# Allegro board EGC_MCB_V100R001.brd
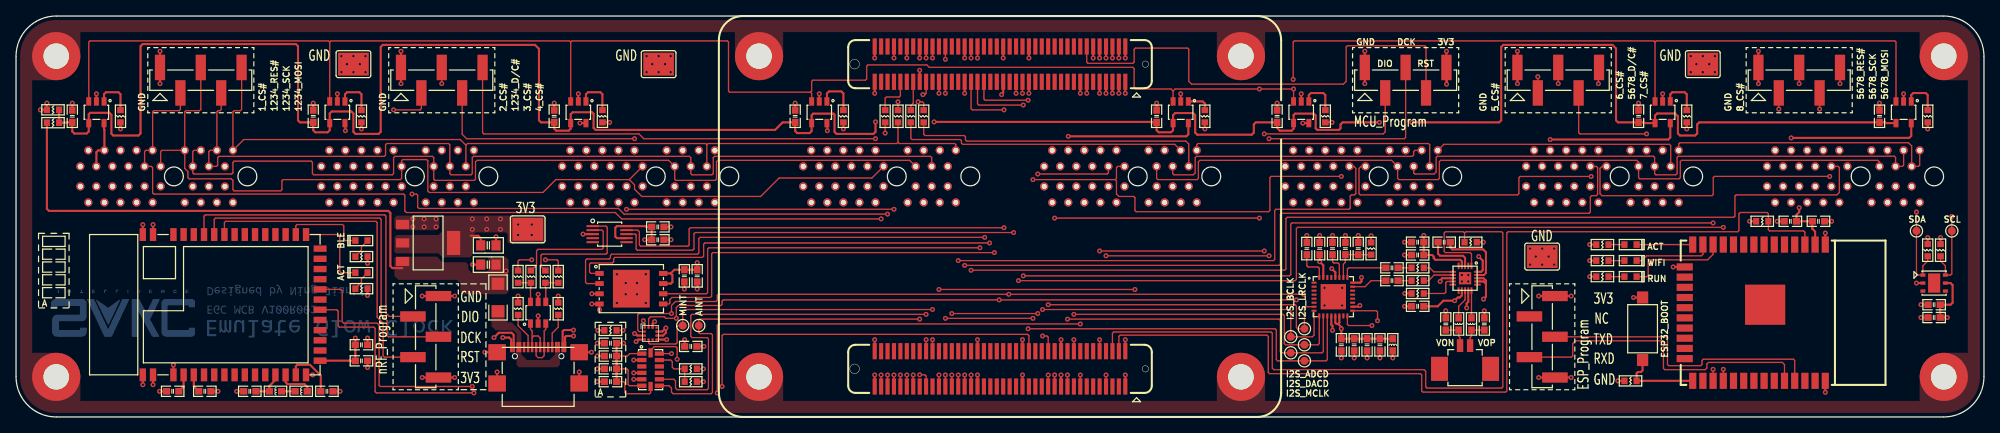
[diagram p0: board, top side]
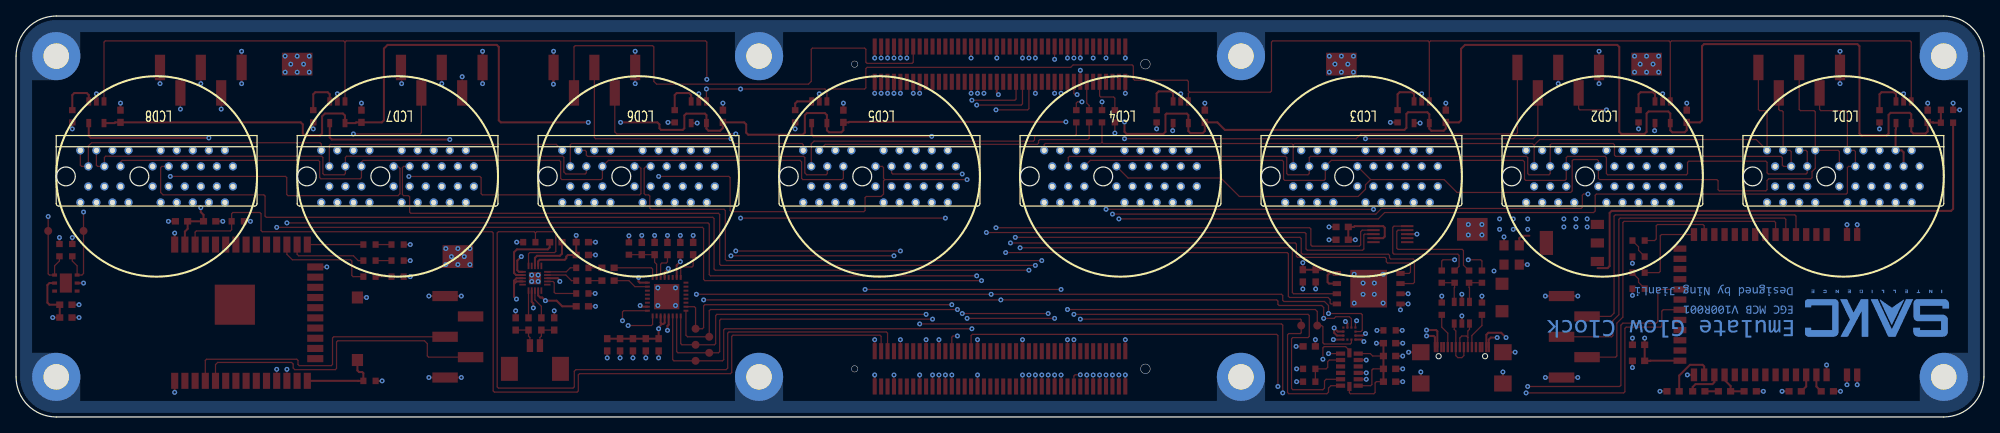
[diagram p1: board, bottom side, seen from below]

Outline 245 x 50 mm; copper layers: TOP, ART01, ART02, BOTTOM. Coordinates in mm from the lower left corner of the outline.
Outline path: 0,45 0,5 arc(1.46,1.46) 5,0 240,0 arc(243.54,1.46) 245,5 245,45 arc(243.54,48.54) 240,50 5,50 arc(1.46,48.54) 0,45

## Design rules (mm)
constraint set DEFAULT: min track width 0.152

## Placement (name value [footprint] x y rotation side)
C1  GRM188R71H104KA93#  [C0603]  7 37.5 90 top
C2  GRM188R71H104KA93#  [C0603]  67 37.5 90 top
C3  GRM188R71H104KA93#  [C0603]  142 37.5 90 top
C4  GRM188R71H104KA93#  [C0603]  202 37.5 90 top
C5  GRM188R71H104KA93#  [C0603]  37 37.5 90 top
C6  GRM188R71H104KA93#  [C0603]  97 37.5 90 top
C7  GRM188R71H104KA93#  [C0603]  157 37.5 90 top
C8  GRM188R71H104KA93#  [C0603]  232 37.5 90 top
C9  GRM21BR61E106MA73#  [C0805]  59.75 19 180 top
C10  GRM21BR61E106MA73#  [C0805]  57.85 21.4 0 top
C11  GRM188R71H104KA93#  [C0603]  79.9 22.1 0 top
C12  GRM188R61E105MA12#  [C0603]  79.9 23.7 0 top
C13  GRM188R71H104KA93#  [C0603]  238.8 14 180 top
C14  GRM188R61E475ME11#  [C0603]  238.8 12.4 180 top
C15  GRM188R71H104KA93#  [C0603]  84 8.8 0 top
C16  GRM188R71H104KA93#  [C0603]  74 9.2 180 top
C17  GRM188R61E105MA12#  [C0603]  74 6 180 top
C18  GRM188R61E475ME11#  [C0603]  74 7.6 180 top
C19  GRM188R71H104KA93#  [C0603]  74 4.4 180 top
C20  GRM188R71H104KA93#  [C0603]  165 9 270 top
C21  GRM188R71H104KA93#  [C0603]  162.3 21 90 top
C22  GRM188R61E475ME11#  [C0603]  166.6 9 270 top
C23  GRM188R71H104KA93#  [C0603]  168.2 9 270 top
C24  GRM188R71H104KA93#  [C0603]  165.5 21 90 top
C25  GRM188R61E475ME11#  [C0603]  169.8 9 270 top
C26  GRM188R61E475ME11#  [C0603]  167.1 21 90 top
C27  GRM188R61E475ME11#  [C0603]  160.7 21 90 top
C28  GRM188R61E475ME11#  [C0603]  163.9 21 90 top
C29  GRM188R61E475ME11#  [C0603]  174.5 21.8 180 top
C30  GRM188R71H104KA93#  [C0603]  174.5 20.2 180 top
C31  GRM188R71E153KA01#  [C0603]  171.3 18.6 0 top
C32  GRM188R71E153KA01#  [C0603]  171.3 17 0 top
C33  GRM188R61E475ME11#  [C0603]  177.8 21.8 0 top
C34  GRM188R61E475ME11#  [C0603]  174.5 13.8 180 top
C35  GRM188R71E102KA01#  [C0603]  178 11.6 90 top
C36  GRM188R71E102KA01#  [C0603]  182.8 11.6 90 top
C37  GRM188R71H104KA93#  [C0603]  83.2 17.6 270 top
C38  GRM188R61E475ME11#  [C0603]  84.8 17.6 270 top
C39  GRM188R71H104KA93#  [C0603]  38.7 3.2 0 top
C40  GRM1885C1H101JA01#  [C0603]  23.5 3.2 180 top
C41  GRM1885C1H101JA01#  [C0603]  19.5 3.2 0 top
C42  GRM188R61E475ME11#  [C0603]  43 9 0 top
C43  GRM188R61E105MA12#  [C0603]  29.1 3.2 180 top
C44  GRM188R71H104KA93#  [C0603]  43 7 0 top
C45  GRM188R71H104KA93#  [C0603]  224.4 24.4 180 top
C46  GRM188R61E105MA12#  [C0603]  220.9 24.4 0 top
F1  SL1206200  [R1206]  60 13.19 90 top
L1  BLM18AG102SN1  [L0603]  171.4 9 90 top
L2  BLM18AG102SN1  [L0603]  181.2 11.6 270 top
L3  BLM18AG102SN1  [L0603]  179.6 11.6 270 top
L4  MLZ1608N100LT000  [L0603]  35.5 3.2 180 top
L5  CLH1608T-15NJ-N  [L0603]  32.3 3.2 180 top
M1  HOLE_3R18MM_PLATED  [MHOLE125]  5 5 0 top
M2  HOLE_3R18MM_PLATED  [MHOLE125]  240 5 0 top
M3  HOLE_3R18MM_PLATED  [MHOLE125]  240 45 0 top
M4  HOLE_3R18MM_PLATED  [MHOLE125]  5 45 0 top
M5  HOLE_3R18MM_PLATED  [MHOLE125]  92.5 45 0 top
M6  HOLE_3R18MM_PLATED  [MHOLE125]  92.5 5 0 top
M7  HOLE_3R18MM_PLATED  [MHOLE125]  152.5 5 0 top
M8  HOLE_3R18MM_PLATED  [MHOLE125]  152.5 45 0 top
MD1  E73-2G4M04S1B  [MD_1130X689_44P]  37.85 5.25 90 top
MD2  ESP32-WROOM-32  [MD1004X709_38P_TP]  225.25 21.5 270 top
NOREF  -  []  73.26 10.42 90 top
NOREF#2  -  []  173.74 15.4 0 top
NOREF#3  -  []  78.5 21.46 90 top
NOREF#4  -  []  177.37 10.2 0 top
NOREF#5  -  []  205.95 36.65 90 top
NOREF#6  -  []  177.06 21.42 0 top
NOREF#7  -  []  164.62 9.74 0 top
NOREF#8  -  []  65.16 17.12 90 top
NOREF#9  -  []  41.6 6.37 90 top
NOREF#10  -  []  42.26 17.62 0 top
NOREF#11  -  []  147.26 37.12 90 top
NOREF#12  -  []  158.74 38.83 90 top
NOREF#13  -  []  41.86 17.59 90 top
NOREF#14  -  []  61.54 21.98 0 top
NOREF#15  -  []  71.86 37.09 90 top
NOREF#16  -  []  109.65 30 0 top
NOREF#17  -  []  4.98 37.89 0 top
NOREF#18  -  []  26 28.75 90 top
NOREF#19  -  []  74.32 5.59 0 top
NOREF#20  -  []  219.5 23.77 90 top
NOREF#21  -  []  37.94 3.2 0 top
NOREF#22  -  []  62.31 7.83 0 top
NOREF#23  -  []  83.26 5.62 0 top
NOREF#24  -  []  42.26 19.62 0 top
NOREF#25  -  []  142.38 36.76 90 top
NOREF#26  -  []  155.79 37.09 90 top
NOREF#27  -  []  173.69 20.58 0 top
NOREF#28  -  []  72.79 5.59 90 top
NOREF#29  -  []  66.76 17.12 0 top
NOREF#30  -  []  225.8 23.77 90 top
NOREF#31  -  []  205.64 36.13 0 top
NOREF#32  -  []  10.64 36.13 0 top
NOREF#33  -  []  16.65 38.83 90 top
NOREF#34  -  []  104.4 44 0 top
NOREF#35  -  []  188.09 18.58 0 top
NOREF#36  -  []  169.42 8.19 90 top
NOREF#37  -  []  110 36.87 0 top
NOREF#38  -  []  215.26 16.5 0 top
NOREF#39  -  []  29.42 2.79 0 top
NOREF#40  -  []  46.65 40.73 90 top
NOREF#41  -  []  199.6 3.87 90 top
NOREF#42  -  []  59.68 18.36 0 top
NOREF#43  -  []  201.38 21.09 0 top
NOREF#44  -  []  74.74 8.82 90 top
NOREF#45  -  []  71.75 -2.18 0 top
NOREF#46  -  []  57.77 20.77 0 top
NOREF#47  -  []  241.24 21.94 0 top
NOREF#48  -  []  41.6 17.36 0 top
NOREF#49  -  []  179.99 11.19 90 top
NOREF#50  -  []  40.64 36.13 0 top
NOREF#51  -  []  12.26 37.12 0 top
NOREF#52  -  []  196.1 16.86 0 top
NOREF#53  -  []  96.24 37.5 0 top
NOREF#54  -  []  101.6 39.95 0 top
NOREF#55  -  []  72.26 37.12 0 top
NOREF#56  -  []  231.37 36.1 0 top
NOREF#57  -  []  74.25 13.72 90 top
NOREF#58  -  []  206.52 38.89 90 top
NOREF#59  -  []  198 28.75 0 top
NOREF#60  -  []  78 9.4 90 top
NOREF#61  -  []  216 23.77 90 top
NOREF#62  -  []  28.29 3.58 0 top
NOREF#63  -  []  49.45 25.05 0 top
NOREF#64  -  []  111.6 36.87 90 top
NOREF#65  -  []  36.9 2.56 90 top
NOREF#66  -  []  62.11 7.58 0 top
NOREF#67  -  []  178.12 21.39 0 top
NOREF#68  -  []  61.74 17.5 0 top
NOREF#69  -  []  36.24 37.5 0 top
NOREF#70  -  []  215.65 40.73 90 top
NOREF#71  -  []  162.62 20.59 0 top
NOREF#72  -  []  166.47 19.6 0 top
NOREF#73  -  []  141 26.75 0 top
NOREF#74  -  []  17.5 30 0 top
NOREF#75  -  []  206 28.75 90 top
NOREF#76  -  []  236.86 37.09 90 top
NOREF#77  -  []  164.22 20.59 0 top
NOREF#78  -  []  243.25 21.06 90 top
NOREF#79  -  []  79.65 30 0 top
NOREF#80  -  []  17.05 5.25 0 top
NOREF#81  -  []  105.49 9 0 top
NOREF#82  -  []  200.24 21.5 0 top
NOREF#83  -  []  228 28.75 0 top
NOREF#84  -  []  19.65 30 0 top
NOREF#85  -  []  196.1 20.86 0 top
NOREF#86  -  []  74.38 10.39 0 top
NOREF#87  -  []  229.07 28.98 0 top
NOREF#88  -  []  207.24 37.5 0 top
NOREF#89  -  []  177.24 11.6 0 top
NOREF#90  -  []  161.01 8.54 0 top
NOREF#91  -  []  83.24 6 0 top
NOREF#92  -  []  82.56 19 0 top
NOREF#93  -  []  166.65 38.83 90 top
NOREF#94  -  []  33.7 2.56 90 top
NOREF#95  -  []  101.6 36.87 90 top
NOREF#96  -  []  169.65 30 0 top
NOREF#97  -  []  106.8 36.87 0 top
NOREF#98  -  []  70.95 36.65 90 top
NOREF#99  -  []  137.05 2.8 0 top
NOREF#100  -  []  46.65 38.83 90 top
NOREF#101  -  []  180.44 11.6 0 top
NOREF#102  -  []  108.58 37.09 0 top
NOREF#103  -  []  64.48 17.09 0 top
NOREF#104  -  []  237 26.75 90 top
NOREF#105  -  []  41.86 21.59 90 top
NOREF#106  -  []  146.86 37.09 90 top
NOREF#107  -  []  42.24 9 0 top
NOREF#108  -  []  222 43.59 0 top
NOREF#109  -  []  236.52 38.89 90 top
NOREF#110  -  []  79.16 21.72 90 top
NOREF#111  -  []  179.22 12.34 0 top
NOREF#112  -  []  173.69 22.18 0 top
NOREF#113  -  []  41.6 21.36 90 top
NOREF#114  -  []  176.4 21.16 90 top
NOREF#115  -  []  71.6 39.95 0 top
NOREF#116  -  []  166.22 9.74 0 top
NOREF#117  -  []  110.26 37.09 90 top
NOREF#118  -  []  110.66 37.12 0 top
NOREF#119  -  []  78.69 21.69 90 top
NOREF#120  -  []  177 26.75 90 top
NOREF#121  -  []  100 39.35 0 top
NOREF#122  -  []  82.6 3.77 0 top
NOREF#123  -  []  182.04 11.6 0 top
NOREF#124  -  []  106.65 45.2 90 top
NOREF#125  -  []  42.26 19.62 90 top
NOREF#126  -  []  23 43.59 0 top
NOREF#127  -  []  172 31.25 0 top
NOREF#128  -  []  202 31.25 0 top
NOREF#129  -  []  41.79 8.59 90 top
NOREF#130  -  []  164.28 20.26 90 top
NOREF#131  -  []  37.3 2.56 90 top
NOREF#132  -  []  162.43 13.43 0 top
NOREF#133  -  []  61.36 17.09 90 top
NOREF#134  -  []  175.9 13.16 90 top
NOREF#135  -  []  70.75 -4.88 0 top
NOREF#136  -  []  238.04 12.4 0 top
NOREF#137  -  []  37.96 2.82 90 top
NOREF#138  -  []  41.6 39.95 0 top
NOREF#139  -  []  236.6 36.87 0 top
NOREF#140  -  []  61.1 18.34 0 top
NOREF#141  -  []  221.22 23.99 0 top
NOREF#142  -  []  160 39.35 0 top
NOREF#143  -  []  146.52 38.89 0 top
NOREF#144  -  []  9.15 5.25 0 top
NOREF#145  -  []  199.6 3.87 0 top
NOREF#146  -  []  84.32 8.39 0 top
NOREF#147  -  []  148.38 37.09 0 top
NOREF#148  -  []  163.26 19.6 0 top
NOREF#149  -  []  160.06 19.6 0 top
NOREF#150  -  []  113.38 37.09 0 top
NOREF#151  -  []  167.44 9 0 top
NOREF#152  -  []  178.75 17.29 0 top
NOREF#153  -  []  215.65 40.73 0 top
NOREF#154  -  []  3.2 36.06 0 top
NOREF#155  -  []  40.5 4.45 0 top
NOREF#156  -  []  3.84 38.3 0 top
NOREF#157  -  []  42.26 6.62 90 top
NOREF#158  -  []  72.6 19 0 top
NOREF#159  -  []  109.06 37.12 0 top
NOREF#160  -  []  196.74 17.5 0 top
NOREF#161  -  []  229.65 30 0 top
NOREF#162  -  []  237.21 22.74 0 top
NOREF#163  -  []  61.1 16.86 0 top
NOREF#164  -  []  196.74 19.5 0 top
NOREF#165  -  []  196.76 17.12 0 top
NOREF#166  -  []  82.6 5.37 90 top
NOREF#167  -  []  158.19 8 0 top
NOREF#168  -  []  36.24 2.82 90 top
NOREF#169  -  []  37.85 9.56 90 top
NOREF#170  -  []  238.38 20.39 0 top
NOREF#171  -  []  77.33 8.17 0 top
NOREF#172  -  []  0 0 0 top
NOREF#173  -  []  41.79 6.59 90 top
NOREF#174  -  []  159.94 21 0 top
NOREF#175  -  []  40.09 42.32 90 top
NOREF#176  -  []  57.29 20.77 90 top
NOREF#177  -  []  197.88 19.09 0 top
NOREF#178  -  []  208.74 4.51 90 top
NOREF#179  -  []  49.07 28.98 0 top
NOREF#180  -  []  238.46 20.39 90 top
NOREF#181  -  []  140.81 44.34 0 top
NOREF#182  -  []  178.32 11.19 0 top
NOREF#183  -  []  82.79 8.39 90 top
NOREF#184  -  []  196.1 20.86 90 top
NOREF#185  -  []  168 28.75 0 top
NOREF#186  -  []  200.26 17.12 0 top
NOREF#187  -  []  196.1 18.86 0 top
NOREF#188  -  []  3.86 37.92 90 top
NOREF#189  -  []  43.32 6.59 0 top
NOREF#190  -  []  37.96 2.82 0 top
NOREF#191  -  []  200.26 21.12 90 top
NOREF#192  -  []  235.64 36.13 0 top
NOREF#193  -  []  201.74 6.39 0 top
NOREF#194  -  []  70.64 36.13 0 top
NOREF#195  -  []  95.79 37.09 90 top
NOREF#196  -  []  65.64 11.13 0 top
NOREF#197  -  []  49.73 3.65 90 top
NOREF#198  -  []  207.75 7.28 90 top
NOREF#199  -  []  64.5 16.86 90 top
NOREF#200  -  []  5 5 0 top
NOREF#201  -  []  200.65 8 0 top
NOREF#202  -  []  159.31 9.54 0 top
NOREF#203  -  []  61.8 21.98 0 top
NOREF#204  -  []  158.19 10 0 top
NOREF#205  -  []  146.6 36.87 90 top
NOREF#206  -  []  168.52 8.59 0 top
NOREF#207  -  []  178.39 11.19 90 top
NOREF#208  -  []  79.16 23.32 0 top
NOREF#209  -  []  103.38 37.09 0 top
NOREF#210  -  []  180.36 21.42 90 top
NOREF#211  -  []  160.64 36.13 0 top
NOREF#212  -  []  40 39.35 0 top
NOREF#213  -  []  196.44 42 0 top
NOREF#214  -  []  3.86 36.32 90 top
NOREF#215  -  []  63.74 13.83 90 top
NOREF#216  -  []  161.52 38.89 0 top
NOREF#217  -  []  141.62 36.76 0 top
NOREF#218  -  []  216.66 24.02 0 top
NOREF#219  -  []  142 31.25 0 top
NOREF#220  -  []  167.48 20.26 90 top
NOREF#221  -  []  101.6 36.87 0 top
NOREF#222  -  []  82.44 17.6 0 top
NOREF#223  -  []  96.62 36.76 0 top
NOREF#224  -  []  56 28.75 90 top
NOREF#225  -  []  58.89 3.08 90 top
NOREF#226  -  []  168.59 8.59 90 top
NOREF#227  -  []  79.27 3.23 90 top
NOREF#228  -  []  173.76 15.02 0 top
NOREF#229  -  []  173.1 16.36 0 top
NOREF#230  -  []  38.74 38.83 90 top
NOREF#231  -  []  223.19 23.99 90 top
NOREF#232  -  []  71.67 21.03 90 top
NOREF#233  -  []  74.74 5.62 90 top
NOREF#234  -  []  110.64 37.5 0 top
NOREF#235  -  []  240.5 17.5 90 top
NOREF#236  -  []  223.64 24.4 0 top
NOREF#237  -  []  199.86 4.09 90 top
NOREF#238  -  []  83.24 4.4 0 top
NOREF#239  -  []  61.1 16.86 90 top
NOREF#240  -  []  196.76 21.12 90 top
NOREF#241  -  []  43.38 15.59 0 top
NOREF#242  -  []  62.88 17.09 0 top
NOREF#243  -  []  49.45 18.35 90 top
NOREF#244  -  []  206.6 36.87 90 top
NOREF#245  -  []  180.82 12.34 0 top
NOREF#246  -  []  11.6 39.95 0 top
NOREF#247  -  []  48.78 10.95 90 top
NOREF#248  -  []  78.09 42.32 90 top
NOREF#249  -  []  61.76 17.12 90 top
NOREF#250  -  []  13.38 37.09 0 top
NOREF#251  -  []  161.6 36.87 90 top
NOREF#252  -  []  83.26 8.42 0 top
NOREF#253  -  []  178.86 16.9 90 top
NOREF#254  -  []  237.4 15.7 0 top
NOREF#255  -  []  237.59 11.99 90 top
NOREF#256  -  []  73.24 4.4 0 top
NOREF#257  -  []  62.7 16.86 0 top
NOREF#258  -  []  207.26 37.12 90 top
NOREF#259  -  []  139.07 28.98 0 top
NOREF#260  -  []  117 26.75 90 top
NOREF#261  -  []  152.5 5 0 top
NOREF#262  -  []  11.6 39.95 90 top
NOREF#263  -  []  173.76 16.62 90 top
NOREF#264  -  []  41.6 19.36 90 top
NOREF#265  -  []  69.47 1.32 0 top
NOREF#266  -  []  200.26 4.12 90 top
NOREF#267  -  []  85.61 10.94 0 top
NOREF#268  -  []  170.56 18.22 0 top
NOREF#269  -  []  4.98 36.29 0 top
NOREF#270  -  []  78.25 9.65 90 top
NOREF#271  -  []  173.74 20.2 0 top
NOREF#272  -  []  236 28.75 90 top
NOREF#273  -  []  173 43.59 0 top
NOREF#274  -  []  159.89 9 0 top
NOREF#275  -  []  49.73 16.35 0 top
NOREF#276  -  []  167.56 10.4 0 top
NOREF#277  -  []  64.25 8.71 0 top
NOREF#278  -  []  6.37 36.1 0 top
NOREF#279  -  []  83.61 10.94 0 top
NOREF#280  -  []  28.34 3.2 0 top
NOREF#281  -  []  22.74 3.2 0 top
NOREF#282  -  []  179.22 10.79 90 top
NOREF#283  -  []  220.26 11.5 90 top
NOREF#284  -  []  5 0 90 top
NOREF#285  -  []  101.52 38.89 0 top
NOREF#286  -  []  170.09 16.59 90 top
NOREF#287  -  []  41.86 37.09 90 top
NOREF#288  -  []  49.41 7.46 0 top
NOREF#289  -  []  35.79 37.09 90 top
NOREF#290  -  []  167.42 20.59 0 top
NOREF#291  -  []  232.32 37.09 0 top
NOREF#292  -  []  16.65 40.73 90 top
NOREF#293  -  []  181.59 11.19 90 top
NOREF#294  -  []  44.65 6.83 90 top
NOREF#295  -  []  80.1 7.1 90 top
NOREF#296  -  []  173.36 18.19 90 top
NOREF#297  -  []  158 28.75 0 top
NOREF#298  -  []  171.72 8.59 0 top
NOREF#299  -  []  185.65 40.73 90 top
NOREF#300  -  []  58.76 17.93 0 top
NOREF#301  -  []  156.24 37.5 0 top
NOREF#302  -  []  161.52 38.89 90 top
NOREF#303  -  []  199.86 19.09 90 top
NOREF#304  -  []  175.9 21.16 90 top
NOREF#305  -  []  82 31.25 0 top
NOREF#306  -  []  206.6 39.95 0 top
NOREF#307  -  []  84.42 16.79 90 top
NOREF#308  -  []  238.86 20.42 0 top
NOREF#309  -  []  33.56 5.25 0 top
NOREF#310  -  []  137.05 40.8 0 top
NOREF#311  -  []  36.1 5.25 0 top
NOREF#312  -  []  79.27 4.37 90 top
NOREF#313  -  []  164.74 21 0 top
NOREF#314  -  []  59.19 20.74 0 top
NOREF#315  -  []  161.5 12.5 0 top
NOREF#316  -  []  80.22 23.29 0 top
NOREF#317  -  []  66.36 17.09 90 top
NOREF#318  -  []  156.62 36.76 0 top
NOREF#319  -  []  22.29 2.79 90 top
NOREF#320  -  []  23.82 2.79 0 top
NOREF#321  -  []  188.09 18.58 90 top
NOREF#322  -  []  166.72 20.26 0 top
NOREF#323  -  []  182.42 10.86 0 top
NOREF#324  -  []  62.96 17.09 90 top
NOREF#325  -  []  39.02 2.79 0 top
NOREF#326  -  []  57 26.75 90 top
NOREF#327  -  []  170.12 8.59 0 top
NOREF#328  -  []  169.07 28.98 0 top
NOREF#329  -  []  8.74 38.83 90 top
NOREF#330  -  []  106.9 41.8 0 top
NOREF#331  -  []  43.38 19.59 0 top
NOREF#332  -  []  206.6 39.95 90 top
NOREF#333  -  []  236.6 20.16 90 top
NOREF#334  -  []  7.32 37.09 0 top
NOREF#335  -  []  111.86 37.09 90 top
NOREF#336  -  []  174.82 19.79 0 top
NOREF#337  -  []  83.26 4.02 90 top
NOREF#338  -  []  196.36 21.09 90 top
NOREF#339  -  []  5 0 90 top
NOREF#340  -  []  30.5 2.56 90 top
NOREF#341  -  []  16.65 40.73 0 top
NOREF#342  -  []  185.65 38.83 90 top
NOREF#343  -  []  169.16 10.4 0 top
NOREF#344  -  []  79.07 28.98 0 top
NOREF#345  -  []  63.4 11.05 90 top
NOREF#346  -  []  74.32 7.19 0 top
NOREF#347  -  []  141.24 37.5 0 top
NOREF#348  -  []  5.79 37.09 90 top
NOREF#349  -  []  79.14 23.7 0 top
NOREF#350  -  []  161.5 12.5 90 top
NOREF#351  -  []  42.26 15.62 0 top
NOREF#352  -  []  74.32 8.79 0 top
NOREF#353  -  []  80.67 4.97 90 top
NOREF#354  -  []  200.24 17.5 0 top
NOREF#355  -  []  179.78 8.9 0 top
NOREF#356  -  []  92.5 5 0 top
NOREF#357  -  []  40.09 42.58 90 top
NOREF#358  -  []  175.24 21.42 90 top
NOREF#359  -  []  87 26.75 90 top
NOREF#360  -  []  171.02 8.26 0 top
NOREF#361  -  []  59.8 18.36 90 top
NOREF#362  -  []  61.76 13.12 90 top
NOREF#363  -  []  179.7 21.16 0 top
NOREF#364  -  []  174.88 16.59 0 top
NOREF#365  -  []  159.89 7 0 top
NOREF#366  -  []  71.6 39.95 90 top
NOREF#367  -  []  63.36 17.12 0 top
NOREF#368  -  []  208.74 4.51 90 top
NOREF#369  -  []  169.9 16.36 90 top
NOREF#370  -  []  78.09 42.58 0 top
NOREF#371  -  []  138.1 41.8 90 top
NOREF#372  -  []  169.82 38.83 90 top
NOREF#373  -  []  72.64 17.91 0 top
NOREF#374  -  []  101.86 37.09 90 top
NOREF#375  -  []  27.45 42 0 top
NOREF#376  -  []  170.56 16.62 90 top
NOREF#377  -  []  77.5 3.4 0 top
NOREF#378  -  []  171.62 18.19 0 top
NOREF#379  -  []  161.92 20.26 0 top
NOREF#380  -  []  64.5 16.86 0 top
NOREF#381  -  []  178.9 15.8 90 top
NOREF#382  -  []  177.62 10.86 0 top
NOREF#383  -  []  188.41 7.46 0 top
NOREF#384  -  []  165.32 8.59 0 top
NOREF#385  -  []  18.74 3.2 0 top
NOREF#386  -  []  200.24 4.5 0 top
NOREF#387  -  []  239.98 20.39 0 top
NOREF#388  -  []  240.49 23.2 0 top
NOREF#389  -  []  217.78 23.99 0 top
NOREF#390  -  []  174.88 14.99 0 top
NOREF#391  -  []  174.82 13.39 0 top
NOREF#392  -  []  37.38 36.76 90 top
NOREF#393  -  []  167.96 20.62 90 top
NOREF#394  -  []  139.65 30 0 top
NOREF#395  -  []  171.62 16.59 0 top
NOREF#396  -  []  236.6 39.95 0 top
NOREF#397  -  []  42.24 18 0 top
NOREF#398  -  []  111.6 36.87 0 top
NOREF#399  -  []  161.6 36.87 0 top
NOREF#400  -  []  178.27 8.4 90 top
NOREF#401  -  []  165.84 9 0 top
NOREF#402  -  []  140.81 6.34 0 top
NOREF#403  -  []  218.82 38.83 90 top
NOREF#404  -  []  104.86 44.39 0 top
NOREF#405  -  []  55.45 10 0 top
NOREF#406  -  []  75.4 3.77 90 top
NOREF#407  -  []  182.16 10.2 0 top
NOREF#408  -  []  80.22 21.69 0 top
NOREF#409  -  []  0 45 0 top
NOREF#410  -  []  173.74 13.8 0 top
NOREF#411  -  []  219.69 23.99 90 top
NOREF#412  -  []  236.6 20.16 0 top
NOREF#413  -  []  183.18 10.86 90 top
NOREF#414  -  []  241.61 22.74 0 top
NOREF#415  -  []  201.38 19.09 0 top
NOREF#416  -  []  106.8 36.87 90 top
NOREF#417  -  []  166.92 8.59 0 top
NOREF#418  -  []  6.62 36.76 0 top
NOREF#419  -  []  37.49 2.79 90 top
NOREF#420  -  []  74.77 19.93 0 top
NOREF#421  -  []  161.02 20.59 0 top
NOREF#422  -  []  18.76 2.82 90 top
NOREF#423  -  []  174.88 18.19 0 top
NOREF#424  -  []  107.06 37.09 90 top
NOREF#425  -  []  42.26 15.62 90 top
NOREF#426  -  []  110 36.87 90 top
NOREF#427  -  []  176.59 21.39 90 top
NOREF#428  -  []  173.1 14.77 90 top
NOREF#429  -  []  165.57 13.43 90 top
NOREF#430  -  []  173.1 16.36 90 top
NOREF#431  -  []  173.76 16.62 0 top
NOREF#432  -  []  41.86 15.59 90 top
NOREF#433  -  []  199.86 21.09 90 top
NOREF#434  -  []  12.24 37.5 0 top
NOREF#435  -  []  208.09 42.32 90 top
NOREF#436  -  []  74.74 7.22 90 top
NOREF#437  -  []  51 26.75 0 top
NOREF#438  -  []  18.76 2.82 0 top
NOREF#439  -  []  196.76 21.12 0 top
NOREF#440  -  []  181.48 21.39 0 top
NOREF#441  -  []  39.84 42.58 0 top
NOREF#442  -  []  53.03 17.69 0 top
NOREF#443  -  []  58.81 11.97 90 top
NOREF#444  -  []  49.65 30 0 top
NOREF#445  -  []  73.24 6 0 top
NOREF#446  -  []  61.1 12.87 90 top
NOREF#447  -  []  3.2 37.66 90 top
NOREF#448  -  []  73.24 9.2 0 top
NOREF#449  -  []  62.88 13.09 0 top
NOREF#450  -  []  226.44 42 0 top
NOREF#451  -  []  178.97 13 0 top
NOREF#452  -  []  146 28.75 90 top
NOREF#453  -  []  42.24 7 0 top
NOREF#454  -  []  236.6 39.95 90 top
NOREF#455  -  []  164.37 10.4 0 top
NOREF#456  -  []  179.64 16.54 0 top
NOREF#457  -  []  108.66 37.09 90 top
NOREF#458  -  []  165.82 20.59 0 top
NOREF#459  -  []  218 28.75 0 top
NOREF#460  -  []  70.11 4.17 90 top
NOREF#461  -  []  201.38 4.09 0 top
NOREF#462  -  []  201 26.75 0 top
NOREF#463  -  []  82.82 18.34 0 top
NOREF#464  -  []  36.37 36.1 0 top
NOREF#465  -  []  42.26 37.12 90 top
NOREF#466  -  []  67.38 36.76 90 top
NOREF#467  -  []  31.49 3.58 0 top
NOREF#468  -  []  53 43.59 0 top
NOREF#469  -  []  38 28.75 0 top
NOREF#470  -  []  11.6 36.87 0 top
NOREF#471  -  []  72.26 37.12 90 top
NOREF#472  -  []  67.32 37.09 0 top
NOREF#473  -  []  48.12 21.7 90 top
NOREF#474  -  []  225.14 24.02 90 top
NOREF#475  -  []  106.65 7.2 90 top
NOREF#476  -  []  170.64 9 0 top
NOREF#477  -  []  100.64 36.13 0 top
NOREF#478  -  []  82.86 3.99 90 top
NOREF#479  -  []  235.95 36.65 90 top
NOREF#480  -  []  220.16 24.02 90 top
NOREF#481  -  []  71.6 36.87 0 top
NOREF#482  -  []  237.59 13.59 90 top
NOREF#483  -  []  102.26 37.12 0 top
NOREF#484  -  []  61.1 12.87 0 top
NOREF#485  -  []  107.46 37.12 90 top
NOREF#486  -  []  0 5 0 top
NOREF#487  -  []  238.05 15.51 90 top
NOREF#488  -  []  162.26 37.12 0 top
NOREF#489  -  []  161.6 39.95 90 top
NOREF#490  -  []  79.16 21.72 0 top
NOREF#491  -  []  157.38 36.76 90 top
NOREF#492  -  []  11.52 38.89 0 top
NOREF#493  -  []  237.26 37.12 90 top
NOREF#494  -  []  237.3 15.2 0 top
NOREF#495  -  []  238.86 20.42 90 top
NOREF#496  -  []  200.26 4.12 0 top
NOREF#497  -  []  165.88 20.26 90 top
NOREF#498  -  []  166.99 8.59 90 top
NOREF#499  -  []  48 28.75 0 top
NOREF#500  -  []  206.6 36.87 0 top
NOREF#501  -  []  58.83 11.94 0 top
NOREF#502  -  []  64.76 17.09 90 top
NOREF#503  -  []  162.69 20.59 90 top
NOREF#504  -  []  34.69 3.58 0 top
NOREF#505  -  []  145.95 36.65 90 top
NOREF#506  -  []  169.42 9.74 0 top
NOREF#507  -  []  237.1 15.5 0 top
NOREF#508  -  []  173.36 16.59 90 top
NOREF#509  -  []  84.42 18.34 0 top
NOREF#510  -  []  242.89 0.92 0 top
NOREF#511  -  []  19.82 38.83 90 top
NOREF#512  -  []  231.62 36.76 0 top
NOREF#513  -  []  180.34 21.8 0 top
NOREF#514  -  []  226.45 22 0 top
NOREF#515  -  []  169.08 20.59 0 top
NOREF#516  -  []  220.14 24.4 0 top
NOREF#517  -  []  66.1 16.86 90 top
NOREF#518  -  []  3.84 36.7 0 top
NOREF#519  -  []  47.85 17.61 90 top
NOREF#520  -  []  101.52 38.89 90 top
NOREF#521  -  []  145 39.35 0 top
NOREF#522  -  []  109.07 28.98 0 top
NOREF#523  -  []  22 31.25 0 top
NOREF#524  -  []  165.88 17.1 90 top
NOREF#525  -  []  66.74 17.5 0 top
NOREF#526  -  []  86 28.75 90 top
NOREF#527  -  []  98.74 38.83 90 top
NOREF#528  -  []  181.52 11.19 0 top
NOREF#529  -  []  216 23.77 0 top
NOREF#530  -  []  147 26.75 90 top
NOREF#531  -  []  160.95 36.65 90 top
NOREF#532  -  []  143.74 38.83 90 top
NOREF#533  -  []  83.26 4.02 0 top
NOREF#534  -  []  164.87 19.6 0 top
NOREF#535  -  []  147.26 37.12 0 top
NOREF#536  -  []  240.2 15.7 90 top
NOREF#537  -  []  102.24 37.5 0 top
NOREF#538  -  []  97.32 37.09 0 top
NOREF#539  -  []  170.19 8.59 90 top
NOREF#540  -  []  79.65 30 0 top
NOREF#541  -  []  208.09 42.58 90 top
NOREF#542  -  []  64.39 8.56 90 top
NOREF#543  -  []  56.83 20.36 90 top
NOREF#544  -  []  66.1 12.87 90 top
NOREF#545  -  []  239.12 11.99 0 top
NOREF#546  -  []  164.29 20.59 90 top
NOREF#547  -  []  196.36 17.09 90 top
NOREF#548  -  []  161.54 21 0 top
NOREF#549  -  []  78.47 8.17 0 top
NOREF#550  -  []  156.37 36.1 0 top
NOREF#551  -  []  146.52 38.89 90 top
NOREF#552  -  []  200.79 37.09 90 top
NOREF#553  -  []  166.22 8.19 90 top
NOREF#554  -  []  41.86 19.59 90 top
NOREF#555  -  []  239.54 12.02 90 top
NOREF#556  -  []  10.95 36.65 90 top
NOREF#557  -  []  200.26 19.12 0 top
NOREF#558  -  []  27 26.75 90 top
NOREF#559  -  []  43.32 8.59 0 top
NOREF#560  -  []  42.24 37.5 0 top
NOREF#561  -  []  108 28.75 0 top
NOREF#562  -  []  229.65 30 0 top
NOREF#563  -  []  223.59 24.78 0 top
NOREF#564  -  []  199.6 18.86 0 top
NOREF#565  -  []  162.24 37.5 0 top
NOREF#566  -  []  8 28.75 0 top
NOREF#567  -  []  233.74 38.83 90 top
NOREF#568  -  []  109.06 37.12 90 top
NOREF#569  -  []  61.8 21.72 90 top
NOREF#570  -  []  201.62 36.76 0 top
NOREF#571  -  []  82.86 5.59 90 top
NOREF#572  -  []  83.26 5.62 90 top
NOREF#573  -  []  3.2 36.06 90 top
NOREF#574  -  []  103.6 42.08 0 top
NOREF#575  -  []  224.72 23.99 0 top
NOREF#576  -  []  196.76 19.12 90 top
NOREF#577  -  []  188.73 16.35 0 top
NOREF#578  -  []  78.69 23.29 90 top
NOREF#579  -  []  236.09 23.2 0 top
NOREF#580  -  []  108.4 36.87 90 top
NOREF#581  -  []  169.9 17.96 90 top
NOREF#582  -  []  240.2 11.77 90 top
NOREF#583  -  []  232.75 4 90 top
NOREF#584  -  []  200.26 17.12 90 top
NOREF#585  -  []  40.95 36.65 90 top
NOREF#586  -  []  103.6 4.08 0 top
NOREF#587  -  []  40.09 42.58 0 top
NOREF#588  -  []  15.78 5.25 0 top
NOREF#589  -  []  66.36 36.1 0 top
NOREF#590  -  []  138.1 3.8 90 top
NOREF#591  -  []  3.86 36.32 0 top
NOREF#592  -  []  78.11 9.51 90 top
NOREF#593  -  []  61.76 17.12 0 top
NOREF#594  -  []  78 28.75 0 top
NOREF#595  -  []  100.95 36.65 90 top
NOREF#596  -  []  42.26 6.62 0 top
NOREF#597  -  []  76.93 11.51 0 top
NOREF#598  -  []  140.79 37.09 90 top
NOREF#599  -  []  171 26.75 0 top
NOREF#600  -  []  179.6 7.88 0 top
NOREF#601  -  []  66.28 17.09 0 top
NOREF#602  -  []  66.76 13.12 0 top
NOREF#603  -  []  66.1 12.87 0 top
NOREF#604  -  []  7.38 36.76 90 top
NOREF#605  -  []  178.27 12.9 0 top
NOREF#606  -  []  41.52 38.89 0 top
NOREF#607  -  []  37.46 6.22 90 top
NOREF#608  -  []  167.96 20.62 0 top
NOREF#609  -  []  175.24 19.82 90 top
NOREF#610  -  []  112.26 37.12 0 top
NOREF#611  -  []  183.65 6.83 90 top
NOREF#612  -  []  197.88 21.09 0 top
NOREF#613  -  []  201.37 36.1 0 top
NOREF#614  -  []  72.24 37.5 0 top
NOREF#615  -  []  72.4 21.3 0 top
NOREF#616  -  []  63.36 17.12 90 top
NOREF#617  -  []  216.64 24.4 0 top
NOREF#618  -  []  77.5 3.4 90 top
NOREF#619  -  []  196.74 21.5 0 top
NOREF#620  -  []  173.74 21.8 0 top
NOREF#621  -  []  111 26.75 0 top
NOREF#622  -  []  60.2 12.45 0 top
NOREF#623  -  []  72.6 13 90 top
NOREF#624  -  []  34.29 2.79 90 top
NOREF#625  -  []  61.76 13.12 0 top
NOREF#626  -  []  66.74 13.5 0 top
NOREF#627  -  []  47.87 17.59 0 top
NOREF#628  -  []  173.76 18.22 0 top
NOREF#629  -  []  41.6 36.87 90 top
NOREF#630  -  []  163.14 21 0 top
NOREF#631  -  []  173.76 18.22 90 top
NOREF#632  -  []  161.09 20.59 90 top
NOREF#633  -  []  237.24 37.5 0 top
NOREF#634  -  []  159.49 20.59 90 top
NOREF#635  -  []  33.04 2.82 90 top
NOREF#636  -  []  110.66 37.12 90 top
NOREF#637  -  []  238.04 14 0 top
NOREF#638  -  []  19.65 30 0 top
NOREF#639  -  []  173.1 17.96 0 top
NOREF#640  -  []  161.01 6.54 0 top
NOREF#641  -  []  199.6 18.86 90 top
NOREF#642  -  []  82.6 5.37 0 top
NOREF#643  -  []  165.12 20.26 0 top
NOREF#644  -  []  66.62 36.76 0 top
NOREF#645  -  []  179.7 21.16 90 top
NOREF#646  -  []  167.94 21 0 top
NOREF#647  -  []  225.25 21.5 90 top
NOREF#648  -  []  175.24 13.42 90 top
NOREF#649  -  []  237.26 20.42 90 top
NOREF#650  -  []  174.82 21.39 0 top
NOREF#651  -  []  176.79 11.19 90 top
NOREF#652  -  []  196.76 17.12 90 top
NOREF#653  -  []  42.24 16 0 top
NOREF#654  -  []  106.9 3.8 0 top
NOREF#655  -  []  162.26 37.12 90 top
NOREF#656  -  []  27.89 2.79 90 top
NOREF#657  -  []  107.46 37.12 0 top
NOREF#658  -  []  83.52 17.19 0 top
NOREF#659  -  []  170.76 7.6 0 top
NOREF#660  -  []  132.5 41.8 0 top
NOREF#661  -  []  236.52 38.89 0 top
NOREF#662  -  []  84.49 11.4 0 top
NOREF#663  -  []  237.26 20.42 0 top
NOREF#664  -  []  216.66 24.02 90 top
NOREF#665  -  []  208.09 42.58 0 top
NOREF#666  -  []  173.74 18.6 0 top
NOREF#667  -  []  163.52 20.26 0 top
NOREF#668  -  []  77.84 42.58 0 top
NOREF#669  -  []  105.49 47 0 top
NOREF#670  -  []  18.29 2.79 90 top
NOREF#671  -  []  72.6 10.16 90 top
NOREF#672  -  []  199.65 30 0 top
NOREF#673  -  []  128 28.75 0 top
NOREF#674  -  []  43.38 37.09 0 top
NOREF#675  -  []  167.3 20.36 90 top
NOREF#676  -  []  64.05 11.65 90 top
NOREF#677  -  []  173.69 14.18 0 top
NOREF#678  -  []  238.05 15.51 0 top
NOREF#679  -  []  187.78 10.95 90 top
NOREF#680  -  []  84.38 3.99 0 top
NOREF#681  -  []  80.67 6.03 90 top
NOREF#682  -  []  41.6 15.37 0 top
NOREF#683  -  []  111.78 37.09 0 top
NOREF#684  -  []  63.48 12.11 0 top
NOREF#685  -  []  18.1 2.56 90 top
NOREF#686  -  []  197.88 17.09 0 top
NOREF#687  -  []  73.19 4.78 0 top
NOREF#688  -  []  142.32 37.09 0 top
NOREF#689  -  []  188.82 38.83 90 top
NOREF#690  -  []  161.6 39.95 0 top
NOREF#691  -  []  48.4 17.71 90 top
NOREF#692  -  []  96.36 36.1 0 top
NOREF#693  -  []  176 28.75 90 top
NOREF#694  -  []  62.67 12.37 0 top
NOREF#695  -  []  42.26 21.62 90 top
NOREF#696  -  []  31.54 3.2 0 top
NOREF#697  -  []  82.82 16.79 90 top
NOREF#698  -  []  173.74 17 0 top
NOREF#699  -  []  201.64 5.17 90 top
NOREF#700  -  []  73.24 7.6 0 top
NOREF#701  -  []  18 28.75 0 top
NOREF#702  -  []  162.68 20.26 90 top
NOREF#703  -  []  164.24 9 0 top
NOREF#704  -  []  75.4 6.96 90 top
NOREF#705  -  []  216.26 23.99 90 top
NOREF#706  -  []  160.32 20.26 0 top
NOREF#707  -  []  188 28.75 0 top
NOREF#708  -  []  196.1 18.86 90 top
NOREF#709  -  []  112 31.25 0 top
NOREF#710  -  []  78 9.4 0 top
NOREF#711  -  []  215.65 38.83 90 top
NOREF#712  -  []  72.64 16.64 90 top
NOREF#713  -  []  29.84 2.82 90 top
NOREF#714  -  []  196.1 16.86 90 top
NOREF#715  -  []  165.89 20.59 90 top
NOREF#716  -  []  163.38 37.09 0 top
NOREF#717  -  []  237.99 14.38 0 top
NOREF#718  -  []  34.74 3.2 0 top
NOREF#719  -  []  3.46 36.29 90 top
NOREF#720  -  []  169.65 30 0 top
NOREF#721  -  []  75.4 21.3 90 top
NOREF#722  -  []  82.6 8.16 90 top
NOREF#723  -  []  187.84 18.58 0 top
NOREF#724  -  []  97.38 36.76 90 top
NOREF#725  -  []  200.26 19.12 90 top
NOREF#726  -  []  116 28.75 90 top
NOREF#727  -  []  165.97 10.4 0 top
NOREF#728  -  []  173.29 19.79 90 top
NOREF#729  -  []  72.6 10.16 0 top
NOREF#730  -  []  3.2 37.66 0 top
NOREF#731  -  []  63.34 17.5 0 top
NOREF#732  -  []  71.52 38.89 0 top
NOREF#733  -  []  236.86 20.39 90 top
NOREF#734  -  []  37.85 5.25 90 top
NOREF#735  -  []  74.74 4.02 90 top
NOREF#736  -  []  42.26 17.62 90 top
NOREF#737  -  []  237.99 12.78 0 top
NOREF#738  -  []  73.19 7.98 0 top
NOREF#739  -  []  240.2 13.37 90 top
NOREF#740  -  []  36.62 36.76 0 top
NOREF#741  -  []  62.7 16.86 90 top
NOREF#742  -  []  238.84 20.8 0 top
NOREF#743  -  []  215.26 11.5 0 top
NOREF#744  -  []  138 28.75 0 top
NOREF#745  -  []  236.6 36.87 90 top
NOREF#746  -  []  161.08 20.26 90 top
NOREF#747  -  []  69.47 1.32 90 top
NOREF#748  -  []  6.24 37.5 0 top
NOREF#749  -  []  35.82 2.79 0 top
NOREF#750  -  []  179.96 21.39 90 top
NOREF#751  -  []  41.52 38.89 90 top
NOREF#752  -  []  19.82 2.79 0 top
NOREF#753  -  []  22.69 3.58 0 top
NOREF#754  -  []  61.74 13.5 0 top
NOREF#755  -  []  199.6 16.86 0 top
NOREF#756  -  []  110.18 37.09 0 top
NOREF#757  -  []  177.44 42 0 top
NOREF#758  -  []  203.74 38.83 90 top
NOREF#759  -  []  199.6 20.86 90 top
NOREF#760  -  []  215.26 11.5 90 top
NOREF#761  -  []  178.84 11.6 0 top
NOREF#762  -  []  201.24 37.5 0 top
NOREF#763  -  []  3.86 37.92 0 top
NOREF#764  -  []  66.24 37.5 0 top
NOREF#765  -  []  67.88 17.09 0 top
NOREF#766  -  []  11.86 37.09 90 top
NOREF#767  -  []  238.38 37.09 0 top
NOREF#768  -  []  177.06 21.42 90 top
NOREF#769  -  []  199.6 20.86 0 top
NOREF#770  -  []  64.05 11.65 0 top
NOREF#771  -  []  200.24 19.5 0 top
NOREF#772  -  []  63.4 11.05 0 top
NOREF#773  -  []  74.32 3.99 0 top
NOREF#774  -  []  41.6 17.36 90 top
NOREF#775  -  []  231 26.75 0 top
NOREF#776  -  []  61.8 21.98 90 top
NOREF#777  -  []  78.09 42.58 90 top
NOREF#778  -  []  220.16 24.02 0 top
NOREF#779  -  []  66.36 13.09 90 top
NOREF#780  -  []  235 39.35 0 top
NOREF#781  -  []  230.79 37.09 90 top
NOREF#782  -  []  41.6 19.36 0 top
NOREF#783  -  []  196.76 19.12 0 top
NOREF#784  -  []  170.54 17 0 top
NOREF#785  -  []  146.6 39.95 90 top
NOREF#786  -  []  239.54 13.62 90 top
NOREF#787  -  []  81.99 17.19 90 top
NOREF#788  -  []  232 31.25 0 top
NOREF#789  -  []  104.86 6.39 0 top
NOREF#790  -  []  42.26 8.62 0 top
NOREF#791  -  []  173.29 13.39 90 top
NOREF#792  -  []  37.32 37.09 0 top
NOREF#793  -  []  169.04 9 0 top
NOREF#794  -  []  24.24 2.82 90 top
NOREF#795  -  []  63.48 12.11 90 top
NOREF#796  -  []  199.07 28.98 0 top
NOREF#797  -  []  183.12 11.19 0 top
NOREF#798  -  []  83.59 17.19 90 top
NOREF#799  -  []  65.16 17.12 0 top
NOREF#800  -  []  0 0 0 top
NOREF#801  -  []  207.84 42.58 0 top
NOREF#802  -  []  107.44 37.5 0 top
NOREF#803  -  []  174.01 9.3 90 top
NOREF#804  -  []  173.1 17.96 90 top
NOREF#805  -  []  70 39.35 0 top
NOREF#806  -  []  208.38 37.09 0 top
NOREF#807  -  []  139.65 30 0 top
NOREF#808  -  []  238.2 20.16 90 top
NOREF#809  -  []  75.4 5.37 90 top
NOREF#810  -  []  199.86 17.09 90 top
NOREF#811  -  []  84.17 19 0 top
NOREF#812  -  []  73.38 37.09 0 top
NOREF#813  -  []  79.61 9.51 0 top
NOREF#814  -  []  180.36 21.42 0 top
NOREF#815  -  []  59.19 18.36 90 top
NOREF#816  -  []  166.34 21 0 top
NOREF#817  -  []  73.19 9.58 0 top
NOREF#818  -  []  108.4 36.87 0 top
NOREF#819  -  []  237.3 15.2 90 top
NOREF#820  -  []  205 39.35 0 top
NOREF#821  -  []  73.26 10.42 0 top
NOREF#822  -  []  206.86 37.09 90 top
NOREF#823  -  []  83.24 8.8 0 top
NOREF#824  -  []  201.74 6.42 90 top
NOREF#825  -  []  109.65 30 0 top
NOREF#826  -  []  166.65 40.73 90 top
NOREF#827  -  []  161.86 37.09 90 top
NOREF#828  -  []  61.65 8.71 0 top
NOREF#829  -  []  24.9 2.56 90 top
NOREF#830  -  []  76 21.8 90 top
NOREF#831  -  []  164.7 13.6 0 top
NOREF#832  -  []  167.56 20.59 90 top
NOREF#833  -  []  41.6 8.37 90 top
NOREF#834  -  []  78.5 23.07 90 top
NOREF#835  -  []  159.31 7.54 0 top
NOREF#836  -  []  57.45 42 0 top
NOREF#837  -  []  42.24 20 0 top
NOREF#838  -  []  46.65 40.73 0 top
NOREF#839  -  []  239.12 13.59 0 top
NOREF#840  -  []  112.26 37.12 90 top
NOREF#841  -  []  192 43.59 0 top
NOREF#842  -  []  167.3 20.36 0 top
NOREF#843  -  []  171.78 8.26 90 top
NOREF#844  -  []  52 31.25 0 top
NOREF#845  -  []  42.26 21.62 0 top
NOREF#846  -  []  178.9 15.8 0 top
NOREF#847  -  []  179.19 18.73 0 top
NOREF#848  -  []  66.76 13.12 90 top
NOREF#849  -  []  32.62 2.79 0 top
NOREF#850  -  []  0 5 0 top
NOREF#851  -  []  74.25 13.71 0 top
NOREF#852  -  []  37.85 5.25 90 top
NOREF#853  -  []  237.26 37.12 0 top
NOREF#854  -  []  207 26.75 90 top
NOREF#855  -  []  141.37 36.1 0 top
NOREF#856  -  []  73.24 10.8 0 top
NOREF#857  -  []  19.07 28.98 0 top
NOREF#858  -  []  85.12 17.19 0 top
NOREF#859  -  []  61.36 13.09 90 top
NOREF#860  -  []  72.79 3.99 90 top
NOREF#861  -  []  58.74 17.96 90 top
NOREF#862  -  []  10 39.35 0 top
NOREF#863  -  []  109.04 37.5 0 top
NOREF#864  -  []  206.52 38.89 0 top
NOREF#865  -  []  231.24 37.5 0 top
NOREF#866  -  []  102.26 37.12 90 top
NOREF#867  -  []  207.26 37.12 0 top
NOREF#868  -  []  180.82 10.79 90 top
NOREF#869  -  []  146.6 36.87 0 top
NOREF#870  -  []  75.4 8.56 90 top
NOREF#871  -  []  72.79 7.19 90 top
NOREF#872  -  []  237.24 20.8 0 top
NOREF#873  -  []  42.26 8.62 90 top
NOREF#874  -  []  208.74 21.5 0 top
NOREF#875  -  []  175.9 19.57 90 top
NOREF#876  -  []  69.11 3.08 90 top
NOREF#877  -  []  180.56 13 0 top
NOREF#878  -  []  147.24 37.5 0 top
NOREF#879  -  []  185.65 40.73 0 top
NOREF#880  -  []  68 28.75 0 top
NOREF#881  -  []  199.65 30 0 top
NOREF#882  -  []  42.24 22 0 top
NOREF#883  -  []  84.38 5.59 0 top
NOREF#884  -  []  98 28.75 0 top
NOREF#885  -  []  71.6 36.87 90 top
NOREF#886  -  []  79.16 23.32 90 top
NOREF#887  -  []  65.14 17.5 0 top
NOREF#888  -  []  207.24 22 0 top
NOREF#889  -  []  202.5 7.1 90 top
NOREF#890  -  []  162.62 12.3 0 top
NOREF#891  -  []  181.8 4.67 0 top
NOREF#892  -  []  101.6 39.95 90 top
NOREF#893  -  []  112.24 37.5 0 top
NOREF#894  -  []  60.18 12.42 90 top
NOREF#895  -  []  179.92 11.19 0 top
NOREF#896  -  []  165.39 8.59 90 top
NOREF#897  -  []  73.19 6.38 0 top
NOREF#898  -  []  173.29 21.39 90 top
NOREF#899  -  []  199.6 16.86 90 top
NOREF#900  -  []  11.6 36.87 90 top
NOREF#901  -  []  67.88 13.09 0 top
NOREF#902  -  []  11.52 38.89 90 top
NOREF#903  -  []  59.21 12.4 90 top
NOREF#904  -  []  157.32 37.09 0 top
NOREF#905  -  []  57.9 20.77 90 top
NOREF#906  -  []  194.44 10 0 top
NOREF#907  -  []  31.09 2.79 90 top
NOREF#908  -  []  188.09 18.32 90 top
NOREF#909  -  []  83.26 8.42 90 top
NOREF#910  -  []  159.89 11 0 top
NOREF#911  -  []  68.74 38.83 90 top
NOREF#912  -  []  66.1 16.86 0 top
NOREF#913  -  []  58.89 5.27 0 top
NOREF#914  -  []  84.04 17.6 0 top
NOREF#915  -  []  201.38 17.09 0 top
NOREF#916  -  []  178.38 10.86 90 top
NOREF#917  -  []  164.62 8.19 90 top
NOREF#918  -  []  238.2 20.16 0 top
NOREF#919  -  []  56.86 20.33 0 top
NOREF#920  -  []  81 26.75 0 top
NOREF#921  -  []  82.49 11.4 0 top
NOREF#922  -  []  49.78 24.06 90 top
NOREF#923  -  []  174.01 8.4 90 top
NOREF#924  -  []  163.79 8.59 90 top
NOREF#925  -  []  43.38 17.59 0 top
NOREF#926  -  []  12.26 37.12 90 top
NOREF#927  -  []  82.6 3.77 90 top
NOREF#928  -  []  104.4 6 0 top
NOREF#929  -  []  201.66 5.15 0 top
NOREF#930  -  []  173.36 14.99 90 top
NOREF#931  -  []  79.14 22.1 0 top
NOREF#932  -  []  170.56 18.22 90 top
NOREF#933  -  []  166.65 40.73 0 top
NOREF#934  -  []  173.76 15.02 90 top
NOREF#935  -  []  43.38 21.59 0 top
NOREF#936  -  []  170.54 18.6 0 top
NOREF#937  -  []  167.82 9.74 0 top
NOREF#938  -  []  72.79 8.79 90 top
NOREF#939  -  []  232.38 36.76 90 top
NOREF#940  -  []  188.73 3.65 90 top
NOREF#941  -  []  161.66 19.6 0 top
NOREF#942  -  []  72.86 10.39 90 top
NOREF#943  -  []  49.8 24.04 0 top
NOREF#944  -  []  196.36 19.09 90 top
NOREF#945  -  []  145.64 36.13 0 top
NOREF#946  -  []  3.46 37.89 90 top
NOREF#947  -  []  71.8 21.8 0 top
NOREF#948  -  []  202.32 37.09 0 top
NOREF#949  -  []  21 26.75 0 top
NOREF#950  -  []  146.6 39.95 0 top
NOREF#951  -  []  161.01 10.54 0 top
NOREF#952  -  []  177.04 21.8 0 top
NOREF#953  -  []  200.26 21.12 0 top
NOREF#954  -  []  167.82 8.19 90 top
NOREF#955  -  []  49.65 30 0 top
NOREF#956  -  []  204.35 8 90 top
NOREF#957  -  []  78.25 9.65 0 top
NOREF#958  -  []  132.5 3.8 0 top
NOREF#959  -  []  49.83 38.83 90 top
NOREF#960  -  []  170.09 18.19 90 top
NOREF#961  -  []  71.52 38.89 90 top
NOREF#962  -  []  202.38 36.76 90 top
NOREF#963  -  []  41.6 36.87 0 top
NOREF#964  -  []  42.26 37.12 0 top
NOREF#965  -  []  165.3 13.6 90 top
NOREF#966  -  []  170.56 16.62 0 top
NOREF#967  -  []  173.1 14.77 0 top
NOREF#968  -  []  66.76 17.12 90 top
NOREF#969  -  []  65.79 37.09 90 top
NOREF#970  -  []  41.6 21.36 0 top
NOREF#971  -  []  41.6 15.37 90 top
NOREF#972  -  []  41.6 39.95 90 top
P2  61083-081400LF  [CON_1488X236_40X2P_31_M]  122.5 6 180 top
P3  61083-081400LF  [CON_1488X236_40X2P_31_M]  122.5 44 180 top
P4  A2541WV-S-5P-A  [CON_500X250_W100_5P]  173 42 0 top
P5  A2541WV-S-5P-A  [CON_500X250_W100_5P]  23 42 0 top
P6  A2541WV-S-5P-A  [CON_500X250_W100_5P]  222 42 0 top
P7  A2541WV-S-5P-A  [CON_500X250_W100_5P]  53 42 0 top
P8  A2541WV-S-5P-A  [CON_500X250_W100_5P]  192 42 0 top
P12  3183-10200P1T  [CON_PCIE1X_SLOT]  8 28.75 0 bottom
P13  3183-10200P1T  [CON_PCIE1X_SLOT]  68 28.75 0 bottom
P14  3183-10200P1T  [CON_PCIE1X_SLOT]  128 28.75 0 bottom
P15  3183-10200P1T  [CON_PCIE1X_SLOT]  188 28.75 0 bottom
P16  3183-10200P1T  [CON_PCIE1X_SLOT]  38 28.75 0 bottom
P17  3183-10200P1T  [CON_PCIE1X_SLOT]  98 28.75 0 bottom
P18  3183-10200P1T  [CON_PCIE1X_SLOT]  158 28.75 0 bottom
P19  3183-10200P1T  [CON_PCIE1X_SLOT]  218 28.75 0 bottom
P20  TYPE-C-31-M-22  [CON_488X289_20P_16P]  65 1.32 90 top
P21  1.25T-2P-WT  [CON_334X228_4P_2P]  180.4 8.9 270 top
P23  A2541WV-S-5P-A  [CON_500X250_W100_5P]  51 10 270 top
P24  A2541WV-S-5P-A  [CON_500X250_W100_5P]  190 10 270 top
R1  RC0603FR-0722RL  [R0603]  111.4 37.5 270 top
R2  RC0603FR-0722RL  [R0603]  113 37.5 270 top
R3  RC0603FR-0722RL  [R0603]  108.2 37.5 270 top
R4  RC0603FR-0722RL  [R0603]  109.8 37.5 270 top
R5  RC0603FR-070RL  [R0603]  4.6 38.3 0 top
R6  RC0603FR-070RL  [R0603]  4.6 36.7 0 top
R7  RC0603FR-0715RL  [R0603]  13 37.5 270 top
R8  RC0603FR-0715RL  [R0603]  73 37.5 270 top
R9  RC0603FR-0715RL  [R0603]  148 37.5 270 top
R10  RC0603FR-0715RL  [R0603]  208 37.5 270 top
R11  RC0603FR-0715RL  [R0603]  43 37.5 270 top
R12  RC0603FR-0715RL  [R0603]  103 37.5 270 top
R13  RC0603FR-0715RL  [R0603]  163 37.5 270 top
R14  RC0603FR-0715RL  [R0603]  238 37.5 270 top
R15  RC0603FR-075K1L  [R0603]  62.5 13.5 90 top
R16  RC0603FR-075K1L  [R0603]  67.5 13.5 90 top
R17  RC0603FR-070RL  [R0603]  64.1 17.5 90 top
R18  RC0603FR-070RL  [R0603]  65.9 17.5 90 top
R19  RC0603FR-070RL  [R0603]  62.5 17.5 90 top
R20  RC0603FR-070RL  [R0603]  67.5 17.5 90 top
R21  RC0603FR-07100KL  [R0603]  84 4.4 180 top
R22  RC0603FR-07100KL  [R0603]  84 6 0 top
R23  RC0603FR-0710KL  [R0603]  74 10.8 0 top
R24  RC0603FR-074K7L  [R0603]  238 20.8 270 top
R25  RC0603FR-074K7L  [R0603]  239.6 20.8 270 top
R26  RC0603FR-070RL  [R0603]  168.7 21 270 top
R27  RC0603FR-0710KL  [R0603]  181.1 21.8 180 top
R28  RC0603FR-0710KL  [R0603]  174.5 18.6 0 top
R29  RC0603FR-0710KL  [R0603]  174.5 17 0 top
R30  RC0603FR-07100KL  [R0603]  174.5 15.4 180 top
R36  RC0603FR-074K7L  [R0603]  43 20 180 top
R37  RC0603FR-074K7L  [R0603]  43 16 180 top
R38  RC0603FR-074K7L  [R0603]  197.5 17.5 0 top
R39  RC0603FR-074K7L  [R0603]  197.5 19.5 0 top
R40  RC0603FR-074K7L  [R0603]  197.5 21.5 0 top
R41  RC0603FR-0710KL  [R0603]  217.4 24.4 0 top
R42  RC0603FR-0710KL  [R0603]  201 4.5 0 top
S1  EVQPPHA25  [SO2_W300_146X236]  202.5 7.1 90 top
TP1  5016  [TP_170X132_1P]  42 44 0 top
TP2  5016  [TP_170X132_1P]  80 44 0 top
TP3  5016  [TP_170X132_1P]  210 44 0 top
TP4  5016  [TP_170X132_1P]  190 20 0 top
TP5  5016  [TP_170X132_1P]  63.7 23.4 0 top
TP6  TestPoint1R0  [TP39]  241 23.2 0 top
TP7  TestPoint1R0  [TP39]  236.6 23.2 0 top
TP8  TestPoint1R0  [TP39]  83 11.4 0 top
TP9  TestPoint1R0  [TP39]  85 11.4 0 top
TP10  TestPoint1R0  [TP39]  160.4 11 0 top
TP11  TestPoint1R0  [TP39]  158.7 10 0 top
TP12  TestPoint1R0  [TP39]  160.4 9 0 top
TP13  TestPoint1R0  [TP39]  158.7 8 0 top
TP14  TestPoint1R0  [TP39]  160.4 7 0 top
U1  INK1101ST  [SOT23_5]  10 38 180 top
U2  INK1101ST  [SOT23_5]  70 38 180 top
U3  INK1101ST  [SOT23_5]  145 38 180 top
U4  INK1101ST  [SOT23_5]  205 38 180 top
U5  INK1101ST  [SOT23_5]  40 38 180 top
U6  INK1101ST  [SOT23_5]  100 38 180 top
U7  INK1101ST  [SOT23_5]  160 38 180 top
U8  INK1101ST  [SOT23_5]  235 38 180 top
U9  AMS1117-3.3  [SOT223]  51.3 21.7 270 top
U10  CH340E  [MSOP10]  73.9 22.8 90 top
U11  HDC1080DMBR  [PWSON6]  238.8 16.7 0 top
U12  MSA300  [LGA12]  79 10.4 0 top
U13  ADXL345BCCZ-RL7  [LGA14]  79 5.9 0 top
U14  WM8978GEFL/RV  [QFN32]  164 15 0 top
U15  AW8733ATQR  [TQFN20_3X3]  180.4 17.3 270 top
U16  MX35LF2G14AC-Z4I  [WSON8]  76.6 16 270 top
V1  USBLC6-2SC6  [SOT23_6]  65 13 0 top
V2  SML-E12P8W(GREEN)  [V0603]  43 22 180 top
V3  SML-E12P8W(GREEN)  [V0603]  43 18 180 top
V4  SML-E12P8W(GREEN)  [V0603]  201 17.5 0 top
V5  SML-E12P8W(GREEN)  [V0603]  201 19.5 0 top
V6  SML-E12P8W(GREEN)  [V0603]  201 21.5 0 top

## Library data of the parts
C1-C8 C11 C13 C15 C16 C19-C21 C23 C24 C30 C37 C39 C44 C45 = GRM188R71H104KA93#
C9 C10 = GRM21BR61E106MA73#
C12 C17 C43 C46 = GRM188R61E105MA12#
C14 C18 C22 C25-C29 C33 C34 C38 C42 = GRM188R61E475ME11#
C31 C32 = GRM188R71E153KA01#
C35 C36 = GRM188R71E102KA01#
C40 C41 = GRM1885C1H101JA01#
F1 = SL1206200
L1-L3 = BLM18PG121SN1
L4 = MLZ1608N100LT000
L5 = CLH1608T-15NJ-N
M1-M8 = HOLE_3R18MM_PLATED
MD1 = E73-2G4M04S1B
MD2 = ESP32-WROOM-32
P2 P3 = 61083-081400LF
P4-P8 P23 P24 = A2541WV-S-5P-A
P12-P19 = 3183-10200P1T
P20 = TYPE-C-31-M-22
P21 = 1.25T-2P-WT
R1-R4 = RC0603FR-0722RL
R5 R6 R17-R20 R26 = RC0603FR-070RL
R7-R14 = RC0603FR-0715RL
R15 R16 = RC0603FR-075K1L
R21 R22 R30 = RC0603FR-07100KL
R23 R27-R29 R41 R42 = RC0603FR-0710KL
R24 R25 R36-R40 = RC0603FR-074K7L
S1 = EVQPPHA25
TP1-TP5 = 5016
TP6-TP14 = TestPoint1R0
U1-U8 = INK1101ST
U9 = AMS1117-3.3
U10 = CH340E
U11 = HDC1080DMBR
U12 = MSA300
U13 = ADXL345BCCZ-RL7
U14 = WM8978GEFL/RV
U15 = AW8733ATQR
U16 = MX35LF2G14AC-Z4I
V1 = USBLC6-2SC6
V2-V6 = SML-E12P8W

## Footprints (pads in the part's own frame, mm; a bottom-side part is the same pattern mirrored in y, then rotated)
C0603
  rect 0.889x0.813 smd: 1(-0.762,0) 2(0.762,0)
C0805
  rect 1.143x1.27 smd: 1(0,0) 2(1.905,0)
CON_334X228_4P_2P
  rect 2.997x2.108 smd: (2.9,3.18) (2.9,-3.18)
  rect 1.6x0.787 smd: 1(0,0.625) 2(0,-0.625)
CON_488X289_20P_16P
  rect 2.007x2.184 smd: 1(2.85,-5.11) 2(6.75,-5.11) 3(6.75,5.11) 4(2.85,5.11)
  rect 1.27x0.305 smd: A1(7.385,3.35) A4(7.385,2.55) A5(7.385,1.25) A6(7.385,0.25) A7(7.385,-0.25) A8(7.385,-1.25) A9(7.385,-2.55) A12(7.385,-3.35) B1(7.385,-3.05) B4(7.385,-2.25) B5(7.385,-1.75) B6(7.385,-0.75) B7(7.385,0.75) B8(7.385,1.75) B9(7.385,2.25) B12(7.385,3.05)
CON_500X250_W100_5P
  rect 1.27x3.175 smd: 1(-5.08,1.587) 2(-2.54,-1.587) 3(0,1.587) 4(2.54,-1.587) 5(5.08,1.587)
CON_1488X236_40X2P_31_M
  rect 0.508x2.007 smd: 1(-15.6,2.2) 2(-15.6,-2.2) 3(-14.8,2.2) 4(-14.8,-2.2) 5(-14,2.2) 6(-14,-2.2) 7(-13.2,2.2) 8(-13.2,-2.2) 9(-12.4,2.2) 10(-12.4,-2.2) 11(-11.6,2.2) 12(-11.6,-2.2) 13(-10.8,2.2) 14(-10.8,-2.2) 15(-10,2.2) 16(-10,-2.2) 17(-9.2,2.2) 18(-9.2,-2.2) 19(-8.4,2.2) 20(-8.4,-2.2) 21(-7.6,2.2) 22(-7.6,-2.2) 23(-6.8,2.2) 24(-6.8,-2.2) 25(-6,2.2) 26(-6,-2.2) 27(-5.2,2.2) 28(-5.2,-2.2) 29(-4.4,2.2) 30(-4.4,-2.2) 31(-3.6,2.2) 32(-3.6,-2.2) 33(-2.8,2.2) 34(-2.8,-2.2) 35(-2,2.2) 36(-2,-2.2) 37(-1.2,2.2) 38(-1.2,-2.2) 39(-0.4,2.2) 40(-0.4,-2.2) 41(0.4,2.2) 42(0.4,-2.2) 43(1.2,2.2) 44(1.2,-2.2) 45(2,2.2) 46(2,-2.2) 47(2.8,2.2) 48(2.8,-2.2) 49(3.6,2.2) 50(3.6,-2.2) 51(4.4,2.2) 52(4.4,-2.2) 53(5.2,2.2) 54(5.2,-2.2) 55(6,2.2) 56(6,-2.2) 57(6.8,2.2) 58(6.8,-2.2) 59(7.6,2.2) 60(7.6,-2.2) 61(8.4,2.2) 62(8.4,-2.2) 63(9.2,2.2) 64(9.2,-2.2) 65(10,2.2) 66(10,-2.2) 67(10.8,2.2) 68(10.8,-2.2) 69(11.6,2.2) 70(11.6,-2.2) 71(12.4,2.2) 72(12.4,-2.2) 73(13.2,2.2) 74(13.2,-2.2) 75(14,2.2) 76(14,-2.2) 77(14.8,2.2) 78(14.8,-2.2) 79(15.6,2.2) 80(15.6,-2.2)
CON_PCIE1X_SLOT
  round 1.016 hole 0.635: A1(0,0) A2(1,2) A3(2,0) A4(3,2) A5(4,0) A6(5,2) A7(6,0) A8(7,2) A9(8,0) A10(9,2) A11(10,0) A12(13,2) A13(14,0) A14(15,2) A15(16,0) A16(17,2) A17(18,0) A18(19,2) B1(0,-2.5) B2(1,-4.5) B3(2,-2.5) B4(3,-4.5) B5(4,-2.5) B6(5,-4.5) B7(6,-2.5) B8(7,-4.5) B9(8,-2.5) B10(9,-4.5) B11(10,-2.5) B12(13,-4.5) B13(14,-2.5) B14(15,-4.5) B15(16,-2.5) B16(17,-4.5) B17(18,-2.5) B18(19,-4.5)
L0603
  rect 0.889x0.813 smd: 1(-0.762,0) 2(0.762,0)
LGA12
  rect 0.279x0.279 smd: 1(-0.75,0.75) 2(-0.75,0.25) 3(-0.75,-0.25) 4(-0.75,-0.75) 5(-0.25,-0.75) 6(0.25,-0.75) 7(0.75,-0.75) 8(0.75,-0.25) 9(0.75,0.25) 10(0.75,0.75) 11(0.25,0.75) 12(-0.25,0.75)
LGA14
  rect 1.143x0.533 smd: 1(-1.097,2) 2(-1.097,1.2) 3(-1.097,0.4) 4(-1.097,-0.4) 5(-1.097,-1.2) 6(-1.097,-2) 8(1.097,-2) 9(1.097,-1.2) 10(1.097,-0.4) 11(1.097,0.4) 12(1.097,1.2) 13(1.097,2)
  rect 0.533x1.143 smd: 7(0,-2.098) 14(0,2.098)
MD1004X709_38P_TP
  rect 2.007x0.889 smd: 1(0,0) 2(0,-1.27) 3(0,-2.54) 4(0,-3.81) 5(0,-5.08) 6(0,-6.35) 7(0,-7.62) 8(0,-8.89) 9(0,-10.16) 10(0,-11.43) 11(0,-12.7) 12(0,-13.97) 13(0,-15.24) 14(0,-16.51) 25(16.993,-16.51) 26(16.993,-15.24) 27(16.993,-13.97) 28(16.993,-12.7) 29(16.993,-11.43) 30(16.993,-10.16) 31(16.993,-8.89) 32(16.993,-7.62) 33(16.993,-6.35) 34(16.993,-5.08) 35(16.993,-3.81) 36(16.993,-2.54) 37(16.993,-1.27) 38(16.993,0)
  rect 0.889x2.007 smd: 15(2.794,-17.501) 16(4.064,-17.501) 17(5.334,-17.501) 18(6.604,-17.501) 19(7.874,-17.501) 20(9.144,-17.501) 21(10.414,-17.501) 22(11.684,-17.501) 23(12.954,-17.501) 24(14.224,-17.501)
  rect 5.004x5.004 smd: 39(7.5,-7.49)
MD_1130X689_44P
  rect 1.6x0.787 smd: 1(0,22.07) 2(0,20.8) 3(0,18.26) 4(0,16.99) 5(0,15.72) 6(0,14.45) 7(0,13.18) 8(0,11.91) 9(0,10.64) 10(0,9.37) 11(0,8.1) 12(0,6.83) 13(0,5.56) 14(0,4.29) 15(0,3.02) 16(0,1.75) 29(17.5,1.75) 30(17.5,3.02) 31(17.5,4.29) 32(17.5,5.56) 33(17.5,6.83) 34(17.5,8.1) 35(17.5,9.37) 36(17.5,10.64) 37(17.5,11.91) 38(17.5,13.18) 39(17.5,14.45) 40(17.5,15.72) 41(17.5,16.99) 42(17.5,18.26) 43(17.5,20.8) 44(17.5,22.07)
  rect 0.787x1.6 smd: 17(1.77,0) 18(3.04,0) 19(4.31,0) 20(5.58,0) 21(6.85,0) 22(8.12,0) 23(9.39,0) 24(10.66,0) 25(11.93,0) 26(13.2,0) 27(14.47,0) 28(15.74,0)
MHOLE125
  round 5.994 hole 3.175: 1(0,0)
MSOP10
  rect 0.254x1.549 smd: 1(1,2.1) 2(0.5,2.1) 3(0,2.1) 4(-0.5,2.1) 5(-1,2.1) 6(-1,-2.1) 7(-0.5,-2.1) 8(0,-2.1) 9(0.5,-2.1) 10(1,-2.1)
PWSON6
  rect 0.61x0.406 smd: 1(-1.4,1) 2(-1.4,0) 3(-1.4,-1) 4(1.4,-1) 5(1.4,0) 6(1.4,1)
  rect 1.499x2.388 smd: 7(0,0)
QFN32
  rect 0.61x0.254 smd: 1(-2.4,1.75) 2(-2.4,1.25) 3(-2.4,0.75) 4(-2.4,0.25) 5(-2.4,-0.25) 6(-2.4,-0.75) 7(-2.4,-1.25) 8(-2.4,-1.75) 17(2.4,-1.75) 18(2.4,-1.25) 19(2.4,-0.75) 20(2.4,-0.25) 21(2.4,0.25) 22(2.4,0.75) 23(2.4,1.25) 24(2.4,1.75)
  rect 0.254x0.61 smd: 9(-1.75,-2.4) 10(-1.25,-2.4) 11(-0.75,-2.4) 12(-0.25,-2.4) 13(0.25,-2.4) 14(0.75,-2.4) 15(1.25,-2.4) 16(1.75,-2.4) 25(1.75,2.4) 26(1.25,2.4) 27(0.75,2.4) 28(0.25,2.4) 29(-0.25,2.4) 30(-0.75,2.4) 31(-1.25,2.4) 32(-1.75,2.4)
  rect 3.15x3.15 smd: 33(0,0)
R0603
  rect 0.762x0.813 smd: 1(-0.762,0) 2(0.762,0)
R1206
  rect 1.524x1.6 smd: 1(0,0) 2(3.429,0)
SO2_W300_146X236
  rect 1.499x1.397 smd: 1(0,0) 2(7.8,0)
SOT23_5
  rect 0.61x1.041 smd: 1(-0.95,-1.35) 2(0,-1.35) 3(0.95,-1.35) 4(0.95,1.35) 5(-0.95,1.35)
SOT23_6
  rect 0.61x1.041 smd: 1(-0.95,-1.35) 2(0,-1.35) 3(0.95,-1.35) 4(0.95,1.35) 5(0,1.35) 6(-0.95,1.35)
SOT223
  rect 1.143x1.651 smd: 1(-2.31,-3.175) 2(0,-3.175) 3(2.31,-3.175)
  rect 2.997x1.651 smd: 4(0,3.175)
TP39
  round 0.991 smd: 1(0,0)
TP_170X132_1P
  rect 3.81x2.845 smd: 1(0,0)
TQFN20_3X3
  rect 0.813x0.229 smd: 1(-1.54,0.8) 2(-1.54,0.4) 3(-1.54,0) 4(-1.54,-0.4) 5(-1.54,-0.8) 11(1.54,-0.8) 12(1.54,-0.4) 13(1.54,0) 14(1.54,0.4) 15(1.54,0.8)
  rect 0.229x0.813 smd: 6(-0.8,-1.54) 7(-0.4,-1.54) 8(0,-1.54) 9(0.4,-1.54) 10(0.8,-1.54) 16(0.8,1.54) 17(0.4,1.54) 18(0,1.54) 19(-0.4,1.54) 20(-0.8,1.54)
  rect 1.524x1.524 smd: 21(0,0)
V0603
  rect 0.762x0.813 smd: 1(-0.762,0) 2(0.762,0)
WSON8
  rect 0.61x1.041 smd: 1(-1.905,-3.96) 2(-0.635,-3.96) 3(0.635,-3.96) 4(1.905,-3.96) 5(1.905,3.96) 6(0.635,3.96) 7(-0.635,3.96) 8(-1.905,3.96)
  rect 4.699x4.572 smd: 9(0,0)

## Nets
